# Altium PCB captivate_fr2633.PcbDoc (part 2 of 2)
Units mil, origin at the board's own origin, x right, y up, seen from the top; angles counter-clockwise.
Board outline 2500 x 2500 mil, 2 copper layers (Top Layer, Bottom Layer), stack 62 mil thick; 67 components, 64 nets, 248 pads, 53 vias.
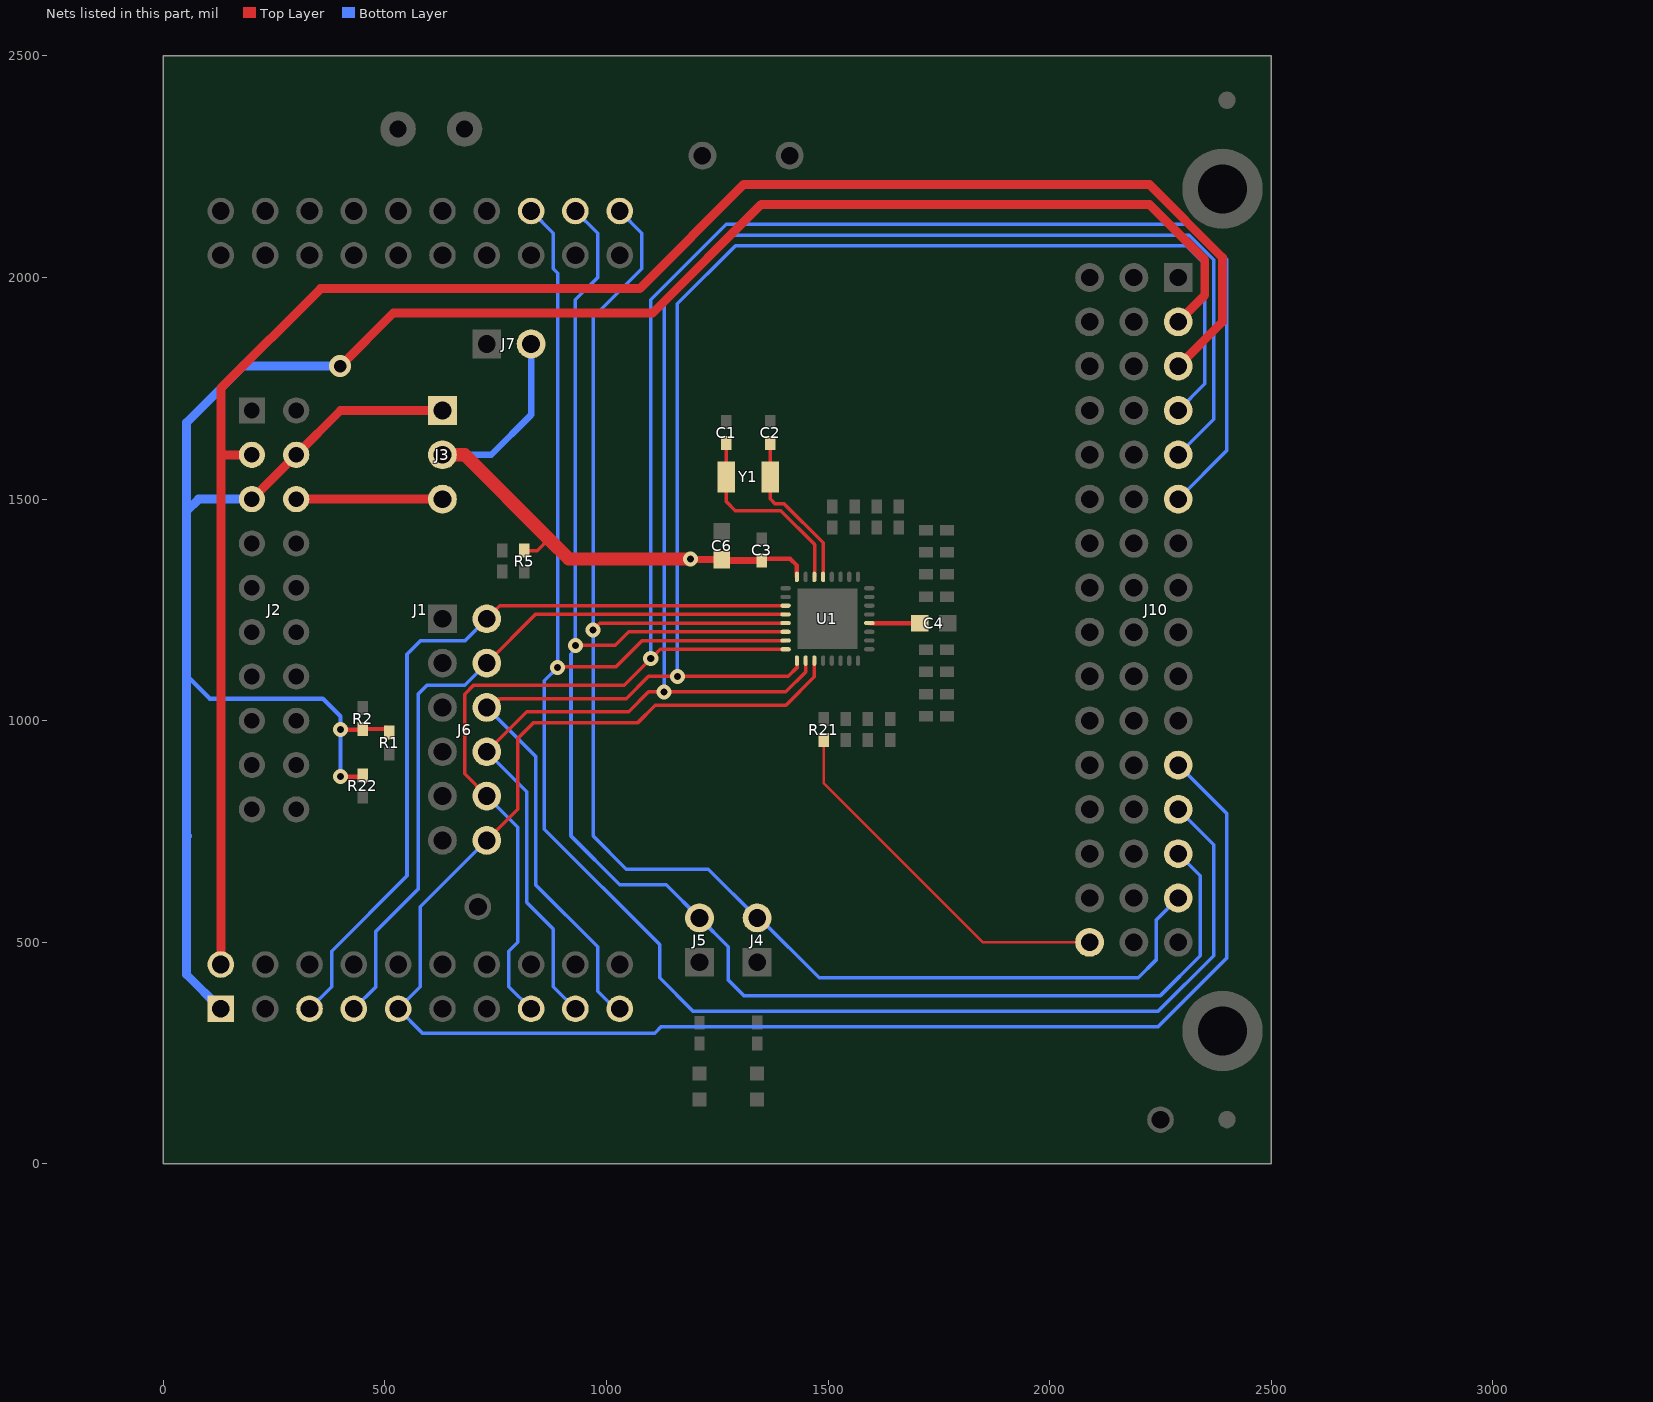
[diagram p2: the nets of this part, all layers, seen from the top]

## Via types
v1: diameter 34, hole 16, Top Layer to Bottom Layer, tented both sides, 47 vias
v2: diameter 19.68, hole 7.87, Top Layer to Bottom Layer, 5 vias
v3: diameter 50, hole 28, Top Layer to Bottom Layer, tented both sides, 1 vias

## Nets (pads, with @x,y where several pads share a name; then routed paths per layer and width w, separated by ;. In a path a pad name is that pad's centre, name@x,y a point inside that pad or via, vN(x,y) a via of type N, cw(c..) or ccw(c..) an arc to the next point about the centre after c; other vN are vias at no path point) (continued)
NetJ10_c16: J10.C16 R21.1 | length 845.5
  Top Layer w6: R21.1@1490,956.38 1490,860 1850,500 J10.C16@2090,500
P1.0: J1.13 J10.A13 U1.7 | length 4120.3
  Top Layer w8: v1(890,1120) 891.67,1121.67 1021.67,1121.67 1080,1180 1403.31,1180 U1.7@1404.17,1180.87
  Bottom Layer w8: J1.13@830,2150 880,2100 880,2020 890,2010 v1(890,1120) 860,1090 860,755 1120,495 1120,420 1195,345 2245,345 2370,470 2370,720 J10.A13@2290,800 J10.A13@2280,800
P1.1/IRQ: J1.8 J6.10 J10.A6 U1.8 | length 4353.9
  Top Layer w7.87: J6.10@730,830 680,880 680,1060 700,1080 1040,1080 v1(1100,1140) 1121.18,1161.18 U1.8@1404.17,1161.18
  Bottom Layer w7.87: J6.10@730,830 800,760 800,500 780,480 780,400 J1.8@830,350
  Bottom Layer w8: v1(1100,1140) 1100,1950 1270,2120 2320,2120 2400,2040 2400,1610 J10.A6@2290,1500
P1.6/LED2: J1.11 J4.2 J10.A15 U1.5 | length 3499.4
  Top Layer w8: v1(970,1205) 985,1220 1280,1220 U1.5@1404.17,1220.24
  Bottom Layer w8: J1.11@1030,2150 1080,2100 1080,2020 975,1915 970,1915 v1(970,1205) 970,740 1045,665 1230,665 J4.2@1340,555 1345,555 1480,420 2200,420 2240,460 2240,550 J10.A15@2290,600
P1.7/LED1: J1.12 J5.2 J10.A14 U1.6 | length 3841.7
  Top Layer w8: v1(930,1170) 1020,1170 1050.55,1200.55 U1.6@1404.17,1200.55
  Bottom Layer w8: J1.12@930,2150 980,2100 980,2000 930,1950 v1(930,1170) 920,1150 920,740 1030,630 1135,630 J5.2@1210,555 1275,490 1275,415 1310,380 2250,380 2340,470 2340,650 J10.A14@2290,700
P2.2/SYNC: J1.5 J6.12 J10.A12 U1.11 | length 3928.8
  Top Layer w8: J6.12@730,730 800,800 800,960 835,995 1070,995 1110,1035 1405,1035 1469.13,1099.13 U1.11@1469.13,1135.59
  Bottom Layer w8: J6.12@730,730 580,580 580,400 J1.5@530,350 585,295 1109,295 1124,310 2245,310 2400,465 2400,790 J10.A12@2290,900
UCA0_RXD: J1.4 J6.4 U1.4 | length 1673.9
  Top Layer w8: J6.4@730,1130 839.99,1239.99 919.99,1239.99 U1.4@1404.17,1239.92 U1.4@1404.09,1240
  Bottom Layer w8: J1.4@430,350 480,400 480,525 575,620 575,1060 595,1080 680,1080 J6.4@730,1130
UCA0_TXD: J1.3 J6.2 U1.3 | length 1790.7
  Top Layer w8: J6.2@730,1230 759.61,1259.61 U1.3@1404.17,1259.61
  Bottom Layer w8: J1.3@330,350 380,400 380,480 550,650 550,1150 580,1180 680,1180 J6.2@730,1230
UCB0_SCL: J1.9 J6.8 J10.A5 U1.10 | length 4160.7
  Top Layer w8: J6.8@730,930 820,1020 1050,1020 1095,1065 v1(1130,1065) 1404.45,1065 1449.45,1110 U1.10@1449.45,1135.59
  Bottom Layer w8: J6.8@730,930 820,840 820,590 880,530 880,400 J1.9@930,350 ; v1(1130,1065) 1130,1945.39 1279.61,2095 2315,2095 2370,2040 2370,1680 J10.A5@2290,1600
UCB0_SDA: J1.10 J6.6 J10.A4 U1.9 | length 4020.5
  Top Layer w7.87: 1045,1050 1095,1100 v1(1160,1100) 1410,1100
  Top Layer w8: J6.6@730,1030 740,1030 760,1050 1045,1050 ; J1.10@1020,350 J1.10@1030,350 ; 1410,1100 1430,1120 1430,1135.35 U1.9@1429.76,1135.59
  Bottom Layer w7.87: v1(1160,1100) 1160,1940.79 1291.28,2072.06 2307.94,2072.06 2350,2030 2350,1760 J10.A4@2290,1700
  Bottom Layer w8: J6.6@730,1030 840,920 840,630 980,490 980,390 J1.10@1020,350
VCC_5V: J1.21 J2.3 J10.A3 | length 4175.3
  Top Layer w20: J1.21@130,450 130,1750 355,1975 1075,1975 1310,2210 2225,2210 2390,2045 2390,1900 J10.A3@2290,1800 ; 130.05,1599.95 J2.3@200,1599.95
VCC_LDO: J1.1 J2.4 J2.5 J3.1 J10.A2 R1.2 R2.2 R22.2 | length 5459.7
  Top Layer w10: v1(400,874) 447.38,874 R22.2@450,876.62 ; v1(400,980) R2.2@448.62,980 ; R2.2@450,981.38 R1.2@502.24,981.38
  Top Layer w15: R2.2@448.62,980 R2.2@450,981.38 ; R1.2@502.24,981.38 R1.2@510,973.62
  Top Layer w20: J2.5@200,1499.95 J2.4@300,1599.95 400.05,1700 J3.1@630,1700 ; v3(399,1800) 519,1920 1104.61,1920 1349.61,2165 2225,2165 2350,2040 2350,1960 J10.A2@2290,1900
  Bottom Layer w10: 52.5,1102.5 105,1050 360,1050 400,1010 v1(400,980) v1(400,874)
  Bottom Layer w15: 52.5,745 57.5,740
  Bottom Layer w20: J1.1@130,350 52.5,427.5 52.5,745 52.5,1102.5 52.5,1472.5 ; J2.5@200,1499.95 79.95,1499.95 52.5,1472.5 ; v3(399,1800) 180,1800 52.5,1672.5 52.5,1472.5 ; J10.A2@2290,1900 J10.A2@2311.48,1900
VCC_METERED: J2.6 J3.3 | length 330
  Top Layer w20: J2.6@300,1499.95 J2.6@300,1499.95 J3.3@630,1500
VCC_MSP: C3.1 C6.1 J3.2 J7.2 R5.2 U1.32 | length 1395.5
  Top Layer w8: R5.2@815,1383.62 843.62,1383.62 870,1410
  Top Layer w10: C3.1@1350,1356.38 1358.62,1365 1415,1365 1429.76,1350.24 U1.32@1429.76,1324.57
  Top Layer w15: v1@1191.18,1363.82 1260,1363.82 1262.44,1361.38 C3.1@1350,1361.38
  Top Layer w30: J3.2@630,1600 680,1600 870,1410 915,1365 v1(1190,1365)
  Bottom Layer w15: J3.2@630,1600 740,1600 830,1690 J7.2@830,1850
VREG: C4.1 U1.20 | length 117.5
  Top Layer w10: U1.20@1593.15,1220.24 C4.1@1710.61,1220
XIN: C1.1 U1.30 Y1.1 | length 445.1
  Top Layer w8: C1.1@1270,1626.38 1270.79,1625.59 Y1.1@1270.79,1550 1270.79,1494.21 1290.87,1474.13 1393.42,1474.13 1470,1397.55 1470,1325.43 U1.30@1469.13,1324.57
XOUT: C2.1 U1.29 Y1.2 | length 363.4
  Top Layer w8: C2.1@1370,1626.38 1369.21,1625.59 Y1.2@1369.21,1550 1369.21,1500.79 1380,1490 1400,1490 1488.82,1401.18 U1.29@1488.82,1324.57
pads on no net: FID1.1 FID3.1 H1.0 H2.0 H3.0 H4.0 J1.2 J1.6 J1.7 J1.14 J1.15 J1.16 J1.17 J1.18 J1.19 J1.23 J1.24 J1.25 J1.26 J1.27 J1.28 J1.29 J1.30 J1.31 J1.32 J1.33 J1.34 J1.35 J1.36 J1.37 J1.38 J1.39 J1.40 J10.B2 J10.H1 J10.H2 SH-J1.0 SH-J2.0 SH-J3.0 SH-J4.0 SH-J5.0 SH-J6.0 SH-J7.0 SH-J8.0 SH-J9.0 SH-J10.0

## Polygon pours and split planes (outlines as drawn)
GND on Top Layer "hatched_gnd_top" (hatched 45Degree grid 47 track 8, remove dead copper, pour order 30): 1450,2500 1450,0 2500,0 2500,2500 1450,2500
GND on Top Layer "Top Layer-No Net" (solid, remove dead copper, pour order 13): 1210,1460 1430,1460 1430,1750 1400,1780 1240,1780 1210,1750 1210,1460
GND on Top Layer "solid_gnd_top" (solid, remove dead copper, pour order 46): 0,0 1450,0 1450,1400.21 1400,1450 1200,1450 1200,1755 1235,1790 1270,1790 1395,1790 1405,1790 1440,1755 1440,1490 1450,1480 1450,2500 0,2500
GND on Bottom Layer "hatched_gnd_bottom" (hatched 45Degree grid 47 track 8, remove dead copper, pour order 62): 1450,2500 2500,2500 2500,0 1450,0 1450,2500
GND on Bottom Layer "Bottom Layer-No Net 1" (solid, remove dead copper, pour order 60): 1430,1460 1210,1460 1210,1750 1240,1780 1400,1780 1430,1750
GND on Bottom Layer "Bottom Layer-No Net" (solid, remove dead copper, pour order 54): 0,2500 0,0 1450,0 1450,1400 1400,1450 1200,1450 1200,1755 1235,1790 1405,1790 1440,1755 1440,1489.6 1450,1479.6 1450,2500

## Keep-outs
Keep-Out Layer:
  circle w10: c2400,2400 r50.25
  circle w10: c2400,100 r50.99
  lines w5: 0,0 0,2500 2500,2500 2500,0 0,0
  text ".Layer_Name" at -73,-1708.49 h60

## Other copper
Top Layer:
  text ".Layer_Name" at -73,-1708.49 h60
Bottom Layer:
  region net GND: 1420,1287.01 1420,1300 1451.35,1300 1570,1300 1570,1160 1420,1160
  text ".Layer_Name" at -73,-1708.49 h60

## Silkscreen, mask and mechanical layers (free items; w line width, h text height)
Top Overlay:
  lines w10: 530,125 530,270 ; 830,120 830,270 ; 1925,450 2040,450 2040,2035 1925,2035 ; 1925,850 2120,850 ; 1925,1250 2120,1250 ; 1925,1650 2120,1650 ; 210,2215 210,2470 780,2470 780,2215 210,2215
  text "TM" at 1755,2420 h40
  text "Capacitive Touch" at 1825,2395 h60
  text "CapTIvate" at 1504.38,2393.6 h60
  text "EXTERNAL" at 230,2390 h30
  text "SUPPLY" at 230,2320 h30
  text "MCU Development Board" at 1579.38,2316.51 h60
  text "TO MCU VCC" at 230,2250 h30
  text ".PRJ_Number" at 1660,2250 h60
  text "P1.0" at 850,2220 h35 r90
  text "P1.7" at 945,2220 h35 r90
  text "P1.6" at 1045,2220 h35 r90
  text "MCU RESET" at 1180,2075 h35
  text "3.3" at 1950,1980 h30
  text "CAP" at 1825,1890 h30
  text "3.2" at 1950,1880 h30
  text "EXT VCC" at 908,1858 h30
  text "BLK" at 1825,1835 h30
  text "ENABLE" at 908,1808 h30
  text "3" at 1825,1785 h30
  text "3.1" at 1950,1785 h30
  text "3.3V LDO" at 700,1685 h30
  text "3.0" at 1950,1685 h30
  text "MCU VCC" at 700,1580 h30
  text "2.3" at 1950,1580 h30
  text "CAP" at 1825,1490 h30
  text "3.3V METERED" at 700,1485 h30
  text "2.2" at 1950,1480 h30
  text "BLK" at 1825,1435 h30
  text "2" at 1825,1385 h30
  text "2.1" at 1950,1385 h30
  text "." at 1370,1298.98 h60
  text "2.0" at 1950,1285 h30
  text "TXD/P1.4" at 805,1215 h30
  text "1.3" at 1950,1180 h30
  text "RXD/P1.5" at 805,1115 h30
  text "CAP" at 1825,1090 h30
  text "1.2" at 1950,1080 h30
  text "MSP430FR2633" at 1260,1060 h35
  text "BLK" at 1825,1035 h30
  text "SDA/P1.2" at 805,1015 h30
  text "1" at 1825,985 h30
  text "1.1" at 1950,985 h30
  text "SCL/P1.3" at 805,915 h30
  text "1.0" at 1950,885 h30
  text "IRQ/P1.1" at 805,815 h30
  text "0.3" at 1950,780 h30
  text "SYNC/P2.2" at 805,715 h30
  text "CAP" at 1825,690 h30
  text "0.2" at 1950,680 h30
  text "BLK" at 1825,635 h30
  text "P1.7" at 1225,630 h30 r90
  text "P1.6" at 1355,630 h30 r90
  text "0" at 1825,585 h30
  text "0.1" at 1950,585 h30
  text "GND" at 570,565 h35
  text "0.0" at 1950,485 h30
  text "TXD" at 348,173.7 h35 r90
  text "RXD" at 448,173.7 h35 r90
  text "SCL" at 955,173.7 h35 r90
  text "SDA" at 1060,173.7 h35 r90
  text "GND" at 2172.59,150 h35
  text "P2.2/SYNC" at 350,60 h35
  text "P1.1/IRQ" at 750,60 h35
  text "LED1" at 1130,45 h35
  text "LED2" at 1315,45 h35
  text ".Layer_Name" at -73,-1708.49 h60
Bottom Overlay:
  lines w10: 530,125 530,270 ; 830,120 830,285
  text "P1.0" at 845,2340 h35 r90
  text "P1.7" at 940,2340 h35 r90
  text "P1.6" at 1040,2340 h35 r90
  text "Capacitive Touch MCU Development Board" at 946.93,1862.15 h70 r90
  text "MSP CapTIvate    MCUs" at 870,1703.29 h90 r90
  text "GNDx2" at 160,1690 h30
  text ".PRJ_Number" at 2435,1625 h35 r90
  text "5V" at 157.5,1590 h30
  text "3V3" at 422.5,1589.95 h30
  text "www.ti.com/captivate" at 1015,1551.28 h70 r90
  text "3V3" at 157.5,1490 h30
  text "METERED" at 542.46,1490 h30
  text "GND" at 160,1390 h30
  text "GND" at 422.5,1390 h30
  text "TM" at 840,1135 h50 r90
  text "RXD" at 160,1090 h30
  text "TXD" at 420,1090 h30
  text "Rev" at 2435,1040 h35 r90
  text "SCL" at 160,1000 h30
  text "SDA" at 420,1000 h30
  text ".PCB_Rev" at 2435,920 h35 r90
  text "SYNC" at 160,900 h30
  text "IRQ" at 417.5,900 h30
  text "GNDx2" at 160,780 h30
  text "TXD" at 350,270 h35 r90
  text "RXD" at 450,270 h35 r90
  text "SCL" at 955,270 h35 r90
  text "SDA" at 1055,270 h35 r90
  text "P2.2/SYNC" at 640,60 h35
  text "P1.1/IRQ" at 990,60 h35
  text ".Layer_Name" at -73,-1708.49 h60
Top Paste:
  text ".Layer_Name" at -73,-1708.49 h60
Bottom Paste:
  text ".Layer_Name" at -73,-1708.49 h60
Top Solder:
  text ".Layer_Name" at -73,-1708.49 h60
  text ".Layer_Name" at -73,-1708.49 h60
Bottom Solder:
  text ".Layer_Name" at -73,-1708.49 h60
Drill Guide:
  text ".Layer_Name" at -73,-1708.49 h60
M1 Board Outline:
  the board outline again, w5
  text ".Layer_Name" at -73,-1708.49 h60
M2 Board Dimensions:
  rectangle: -650,-1125 -525,-1000
  rectangle: -525,-1250 -150,-1125
  lines w7: -650,-1125 350,-1125 ; -525,-1250 -525,-1000 ; -400,-1250 -400,-1000 ; -150,-1250 -150,-1000 ; 100,-1250 100,-1000 ; -650,-1250 350,-1250 350,-1000 -650,-1000 -650,-1250
  text ".Layer_Name" at -73,-1708.49 h60
M3 3D STEP Top:
  text ".Layer_Name" at -73,-1708.49 h60
M4 3D STEP Bottom:
  text ".Layer_Name" at -73,-1708.49 h60
M5 Assembly Top:
  lines w10: -942,-1780.17 5658,-1780.17 ; -942,-1576.83 5660,-1576.83 ; -942,-1373.5 -942,-1983.5 3063,-1983.5 5660,-1983.5 5660,-1373.5 -941.5,-1373.5 -941.5,-1983.5 634,-1983.5 ; 1523,-1983.5 1523,-1373.5 ; 2790,-1576.83 2790,-1373.5 ; 3630,-1576.83 3630,-1373.5 ; 4252,-1990 4252,-1787.17
  text "COMPONENTS MARKED 'DNP' SHOULD NOT BE POPULATED." at 503.5,-1168.5 h60
  text "ASSEMBLY VARIANT:" at 503,-1284 h60
  text ".VariantName" at 1539,-1284 h60
  text "PCB VIEWED FROM TOP SIDE" at -878.5,-1505.67 h60
  text "BOARD #:" at 1598,-1505.67 h60
  text ".PRJ_Number" at 2143.5,-1505.67 h60
  text "REV:" at 2988,-1505.67 h60
  text ".PCB_Rev" at 3279.5,-1505.67 h60
  text "SVN REV:" at 3826,-1505.67 h60
  text ".VersionControl_RevNumber" at 4332,-1505.67 h60
  text "PLOT NAME =" at -878.5,-1914.34 h60
  text ".plot_File_Name" at -73,-1914.34 h60
  text "GENERATED    :" at 1600,-1914.34 h60
  text ".Print_Date" at 2469.5,-1914.34 h60
  text ".Print_Time" at 3198.5,-1914.34 h60
  text "TEXAS INSTRUMENTS" at 4463,-1914.34 h60
M6 Assembly Bottom:
  lines w10: -942.5,-1577.33 5659.5,-1577.33 ; -940.5,-1780.67 5659.5,-1780.67 ; 465.5,-1990.5 465.5,-1787.67 ; 1087.5,-1577.33 1087.5,-1374 ; 1927.5,-1577.33 1927.5,-1374 ; 3194.5,-1984 3194.5,-1374 ; 4083.5,-1984 5659,-1984 5659,-1374 -942.5,-1374 -942.5,-1984 1654.5,-1984 5659.5,-1984 5659.5,-1374
  text "COMPONENTS MARKED 'DNP' SHOULD NOT BE POPULATED." at 5452,-1168 h60
  text ".VariantName" at 4408,-1284 h60
  text "ASSEMBLY VARIANT:" at 5447,-1284 h60
  text ".VersionControl_RevNumber" at 385.5,-1506.17 h60
  text "SVN REV:" at 891.5,-1506.17 h60
  text ".PCB_Rev" at 1438,-1506.17 h60
  text "REV:" at 1729.5,-1506.17 h60
  text ".PRJ_Number" at 2574,-1506.17 h60
  text "BOARD #:" at 3119.5,-1506.17 h60
  text "PCB VIEWED FROM BOTTOM SIDE" at 5596,-1506.17 h60
  text "TEXAS INSTRUMENTS" at 254.5,-1914.84 h60
  text ".Print_Time" at 1519,-1914.84 h60
  text ".Print_Date" at 2248,-1914.84 h60
  text "GENERATED    :" at 3117.5,-1914.84 h60
  text ".plot_File_Name" at 4790.5,-1914.84 h60
  text "PLOT NAME =" at 5596,-1914.84 h60
M9 Title Sheet:
  drawing of 57 lines, arcs and shapes, not listed
  text "1" at 89.84,7186.5 h70
  text "2" at 2585.5,7186.5 h70
  text "3" at 5074.84,7186.5 h70
  text "4" at 7581.51,7186.5 h70
  text "5" at 10080.5,7186.5 h70
  text "6" at 12585.5,7186.5 h70
  text "A" at -1066.5,6043.5 h70
  text "A" at 13733.5,6043.5 h70
  text "B" at -1066.5,3663.5 h70
  text "B" at 13733.5,3663.5 h70
  text "C" at -1066.5,1288.5 h70
  text "C" at 13733.5,1288.5 h70
  text "PROJECT TITLE:" at 10693.5,-572.5 h45
  text ".PRJ_Title" at 10743.5,-705.83 h70
  text "DESIGNED FOR:" at 10693.5,-873.5 h45
  text ".PRJ_Customer" at 10743.5,-1013.5 h70
  text "D" at -1066.5,-1081.5 h70
  text "D" at 13733.5,-1081.5 h70
  text "FILE NAME:" at 10693.5,-1173.5 h45
  text ".PCB_File_Name_No_Path" at 10743.5,-1293.5 h70
  text "Texas Instruments (TI) and/or its licensors do not warrant the accuracy or completeness of this specification" at 5724,-1455.34 h45
  text "ENGINEER:" at 10693.5,-1463.5 h45
  text "LAYOUT BY:" at 12198.5,-1463.5 h45
  text "or any information contained therein. TI and/or its licensors do not warrant that this design will meet" at 5679.01,-1568 h45
  text ".PRJ_Engineer" at 10743.5,-1618.49 h70
  text ".PCB_Layout" at 12249,-1618.49 h70
  text "the specifications, will be suitable for your application or fit for any particular purpose, or will operate in" at 5679.01,-1680.67 h45
  text ".Layer_Name" at -73,-1708.49 h60
  text "ALTIUM DESIGNER VERSION:" at 12198.5,-1773.5 h45
  text "an implementation. TI and/or its licensors do not warrant that the design is production worthy. You should" at 5679.01,-1793.33 h45
  text "completely validate and test your design implementation to confirm the system functionality for your application." at 5724,-1906 h45
  text ".print_Scale" at 10743.5,-1906.83 h70
  text ".Application_BuildNumber" at 12249,-1906.83 h70
  text "1" at 89.84,-2113.5 h70
  text "2" at 2585.5,-2113.5 h70
  text "3" at 5074.84,-2113.5 h70
  text "4" at 7581.51,-2113.5 h70
  text "5" at 10080.5,-2113.5 h70
  text "6" at 12585.5,-2113.5 h70
M10 Fab Notes:
  drawing of 185 lines, arcs and shapes, not listed
  text "DESIGN INFORMATION" at 11731.02,5060 h60
  text "MIN. TRACK WIDTH:" at 11086.46,4880 h60
  text "6" at 12182.7,4880 h60
  text "MIL" at 12337.46,4880 h60
  text "MIN. CLEARANCE:" at 11086.46,4748 h60
  text "0.2" at 12122.7,4748 h60
  text "mm" at 12337.46,4748 h60
  text "MIN. VIA PAD SIZE:" at 11086.46,4616 h60
  text "30" at 12152.71,4616 h60
  text "MIL" at 12337.46,4616 h60
  text "0.05mm (2MIL)" at 11781.46,4474.29 h60
  text "MINIMUM ANNULAR RING" at 10757.23,4470 h60
  text "EXTERNAL" at 12489.46,4470 h60
  text "PER" at 10957.23,4352 h60
  text "IPC-D-275 CLASS 2 LEVEL C" at 11177.23,4352 h60
  text "MIL, HOLES" at 12665.46,4239.71 h60
  text "+/-" at 12273,4239 h60
  text "+/-" at 13127,4239 h60
  text "REGISTRATION TOLERANCES:" at 10757.23,4234 h60
  text "METAL" at 11957,4234 h60
  text "5" at 12533.2,4234 h60
  text "3" at 13366.2,4234 h60
  text "MIL" at 13482.46,4234 h60
  text "MATERIAL:" at 10682.46,4024.54 h60
  text "FR-4 High Tg" at 11668.9,3884.21 h60
  text "FR-408" at 11103.46,3875.64 h60
  text "X" at 11515.46,3875.64 h60
  text "OTHER" at 12591.46,3875.64 h60
  text "62 MIL (1.6mm) +/-10%" at 11423.56,3712.92 h60
  text "THICKNESS:" at 10757.23,3708.64 h60
  text "X" at 11295.4,3708.64 h60
  text "OTHER" at 12708.46,3708.64 h60
  text "TOLERANCE:" at 10757.23,3550.64 h60
  text "X" at 11596.53,3550.64 h60
  text "ANSI IPC-6012 TYPE 3 CLASS 2" at 11783.48,3550.64 h60
  text "OTHER +/-" at 11783.46,3394.64 h60
  text "BOW & TWIST:" at 10757.23,3237.64 h60
  text "X" at 11596.53,3237.64 h60
  text "ANSI IPC-6012 TYPE 3 CLASS 2" at 11783.48,3237.64 h60
  text "OTHER +/-" at 11783.46,3079.13 h60
  text "DRILLING:" at 10682.46,2940.64 h60
  text "REFERENCE:" at 10757.23,2823.64 h60
  text "X" at 11405.46,2823.64 h60
  text "AS SHOWN" at 11592.46,2823.64 h60
  text "X" at 12306.46,2823.64 h60
  text "NC_DRILL FILES" at 12443.46,2823.64 h60
  text "PTH MIN COPPER THICKNESS:" at 10757.23,2665.64 h60
  text "X" at 12107.46,2665.64 h60
  text "1MIL" at 12244.46,2665.64 h60
  text "OTHER" at 12741.46,2665.64 h60
  text "BOARD FINISH:" at 10682.46,2506.64 h60
  text "SILKSCREEN:" at 10837.68,2388.64 h60
  text "X" at 11786.46,2388.64 h60
  text "TOP" at 11912.46,2388.64 h60
  text "X" at 12296.46,2388.64 h60
  text "BOTTOM" at 12423.46,2388.64 h60
  text "SILKSCREEN COLOR:" at 10837.68,2221.64 h60
  text "X" at 11785.42,2221.64 h60
  text "WHITE" at 11912.46,2221.64 h60
  text "OTHER" at 12423.46,2221.64 h60
  text "SOLDER RESIST COLOR:" at 10837.68,2051.64 h60
  text "X" at 12520,1895 h60
  text "GREEN" at 11532.46,1892.44 h60
  text "BLUE" at 12123.46,1892.44 h60
  text "OTHER" at 12661.46,1892.44 h60
  text "BLACK" at 12960,1885 h200
  text "IMMERSION GOLD (ENIG)" at 11743.46,1703.92 h60
  text "ENEPIG" at 13081,1700.64 h60
  text "SURFACE FINISH:" at 10682.46,1699.64 h60
  text "X" at 11556.51,1699.64 h60
  text "IMM. TIN/SILVER OR EQUIV" at 11012,1542.64 h60
  text "OTHER" at 12443.46,1542.64 h60
  text "ARRAY/PANEL:" at 10682.46,1363.64 h60
  text "CUT AND TRIM PER MECH LAYER 1" at 11743.46,1359.35 h60
  text "N.C. ROUTE" at 11743.46,1207.64 h60
  text "X" at 12422.46,1207.64 h60
  text "V. SCORE" at 12609.46,1207.64 h60
  text "CERTIFICATION:" at 10682.46,1070.64 h60
  text "MATERIALS AND WORKMANSHIP FOR ALL PCBS" at 11407.46,1070.64 h60
  text "TO MEET OR EXCEED THE REQUIREMENTS OF:" at 11407.46,972.64 h60
  text "X" at 11033.96,836.13 h60
  text "ANSI IPC-A-600F CLASS ->" at 11172.96,836.13 h60
  text "X" at 12812.02,836.13 h60
  text "2" at 12930.96,836.14 h60
  text "1" at 12615.96,834.64 h60
  text "3" at 13284.96,834.64 h60
  text "X" at 11036.02,676.64 h60
  text "UL 94V-0" at 11172.96,676.64 h60
  text "X" at 11848.02,676.64 h60
  text "RoHS" at 11984.96,676.64 h60
  text "OTHER" at 12629.36,676.64 h60
  text "PER ORDER" at 13026.42,676.64 h60
  text "ADDITIONAL REQUIREMENTS:" at 10682.46,535.64 h60
  text "MICROSECTION:" at 10757.23,420.64 h60
  text "YES" at 11662.96,420.64 h60
  text "REQUIRED" at 12524.46,264.49 h60
  text "BARE BOARD ELEC. TEST:" at 10757.23,261.64 h60
  text "NONE" at 12062.96,261.64 h60
  text "X" at 12397.46,261.64 h60
  text "PER ORDER" at 13116.46,261.64 h60
  text "MANUFACTURER'S UL:" at 10757.23,104.64 h60
  text "RAIL" at 11922.96,100.35 h60
  text "METAL" at 12414.77,100.35 h60
  text "X" at 12790,100 h60
  text "SILK" at 12926.46,100.35 h60
  text ".Layer_Name" at -73,-1708.49 h60
M11 Gerber Information:
  lines w10: -942,-1780.17 5658,-1780.17 ; -942,-1576.83 5660,-1576.83 ; -942,-1373.5 -942,-1983.5 3063,-1983.5 5660,-1983.5 5660,-1373.5 -941.5,-1373.5 -941.5,-1983.5 634,-1983.5 ; 1523,-1983.5 1523,-1373.5 ; 2790,-1576.83 2790,-1373.5 ; 3630,-1576.83 3630,-1373.5 ; 4252,-1990 4252,-1787.17
  text "ALL ARTWORK VIEWED FROM TOP SIDE" at -878.5,-1505.67 h60
  text "BOARD #:" at 1598,-1505.67 h60
  text ".PRJ_Number" at 2143.5,-1505.67 h60
  text "REV:" at 2988,-1505.67 h60
  text ".PCB_Rev" at 3279.5,-1505.67 h60
  text "SVN REV:" at 3826,-1505.67 h60
  text ".VersionControl_RevNumber" at 4332,-1505.67 h60
  text "LAYER NAME =" at -878.5,-1708.49 h60
  text "PLOT NAME =" at -878.5,-1914.34 h60
  text ".plot_File_Name" at -73,-1914.34 h60
  text "GENERATED    :" at 1600,-1914.34 h60
  text ".Print_Date" at 2469.5,-1914.34 h60
  text ".Print_Time" at 3198.5,-1914.34 h60
  text "TEXAS INSTRUMENTS" at 4463,-1914.34 h60
M12 Stackup:
  drawing of 191 lines, arcs and shapes, not listed
  text "Layer" at 5640.34,1165 h60
  text "Name" at 6050.26,1165 h60
  text "Material" at 6980,1165 h60
  text "Thickness" at 7839.77,1165 h60
  text "Constant" at 8489.6,1165 h60
  text "Board Layer Stack" at 9059.46,1165 h60
  text "1" at 5640.34,1045 h60
  text "Top Overlay" at 6050.26,1045 h60
  text "2" at 5640.34,925 h60
  text "Top Solder" at 6050.26,925 h60
  text "Solder Resist" at 6980,925 h60
  text "0.40mil" at 7839.77,925 h60
  text "3.5" at 8489.6,925 h60
  text "3" at 5640.34,805 h60
  text "Top Layer" at 6050.26,805 h60
  text "Copper" at 6980,805 h60
  text "1.40mil" at 7839.77,805 h60
  text "4" at 5640.34,685 h60
  text "Dielectric1" at 6050.26,685 h60
  text "FR-4" at 6980,685 h60
  text "59.20mil" at 7839.77,685 h60
  text "4.2" at 8489.6,685 h60
  text "5" at 5640.34,565 h60
  text "Bottom Layer" at 6050.26,565 h60
  text "Copper" at 6980,565 h60
  text "1.40mil" at 7839.77,565 h60
  text "6" at 5640.34,445 h60
  text "Bottom Solder" at 6050.26,445 h60
  text "Solder Resist" at 6980,445 h60
  text "0.40mil" at 7839.77,445 h60
  text "3.5" at 8489.6,445 h60
  text "7" at 5640.34,325 h60
  text "Bottom Overlay" at 6050.26,325 h60
  text ".Layer_Name" at -73,-1708.49 h60
M13 Component Bodies Top:
  text ".Layer_Name" at -73,-1708.49 h60
M14 Component Bodies Bottom:
  text ".Layer_Name" at -73,-1708.49 h60
M15 Courtyards Top:
  text ".Layer_Name" at -73,-1708.49 h60
M16 Courtyards Bottom:
  text ".Layer_Name" at -73,-1708.49 h60
Drill Drawing:
  circle w1: c6073.12,-315 r25
  lines w1: 6048.12,-927.5 6060.62,-927.5 6073.12,-940 6085.62,-927.5 6098.12,-927.5 6085.62,-915 6098.12,-902.5 6085.62,-902.5 6073.12,-890 6060.62,-902.5 6048.12,-902.5 6060.62,-915 6048.12,-927.5 ; 6048.12,-740 6098.12,-740 6073.12,-790 6048.12,-740 ; 6048.12,-640 6048.12,-627.5 6060.62,-615 6048.12,-602.5 6048.12,-590 6060.62,-590 6073.12,-602.5 6085.62,-590 6098.12,-590 6098.12,-602.5 6085.62,-615 6098.12,-627.5 6098.12,-640 6085.62,-640 6073.12,-627.5 6060.62,-640 6048.12,-640 ; 6048.12,-477.5 6060.62,-477.5 6060.62,-490 6085.62,-490 6085.62,-477.5 6098.12,-477.5 6098.12,-452.5 6085.62,-452.5 6085.62,-440 6060.62,-440 6060.62,-452.5 6048.12,-452.5 6048.12,-477.5 ; 6048.12,-190 6073.12,-177.5 6098.12,-190 6085.62,-165 6098.12,-140 6073.12,-152.5 6048.12,-140 6060.62,-165 6048.12,-190 ; 6048.12,-40 6098.12,-40 6098.12,10 6048.12,10 6048.12,-40 ; 6048.12,110 6098.12,110 6098.12,160 6048.12,160 6048.12,110 ; 6058.12,120 6088.12,120 6088.12,150 6058.12,150 6058.12,120
  lines w15: 5980,-985 9858.97,-985 ; 5980,215 9858.97,215 ; 6530.88,-1135 6530.88,365 ; 7228.69,-1135 7228.69,365 ; 8574.29,-1135 8574.29,365 ; 9080.17,-1135 9080.17,365 ; 5980,-1135 9858.97,-1135 9858.97,365 5980,365 5980,-1135
  text "Symbol" at 6070,260 h72
  text "Hit Count" at 6575.88,260 h72
  text "Finished Hole Size" at 7273.69,260 h72
  text "Plated" at 8619.29,260 h72
  text "Hole Type" at 9125.17,260 h72
  text "1" at 6575.88,110 h60
  text "28.00mil (0.711mm)" at 7273.69,110 h60
  text "PTH" at 8619.29,110 h60
  text "Round" at 9125.17,110 h60
  text "2" at 6575.88,-40 h60
  text "37.99mil (0.965mm)" at 7273.69,-40 h60
  text "PTH" at 8619.29,-40 h60
  text "Round" at 9125.17,-40 h60
  text "2" at 6575.88,-190 h60
  text "110.24mil (2.800mm)" at 7273.69,-190 h60
  text "PTH" at 8619.29,-190 h60
  text "Round" at 9125.17,-190 h60
  text "5" at 6575.88,-340 h60
  text "7.87mil (0.200mm)" at 7273.69,-340 h60
  text "PTH" at 8619.29,-340 h60
  text "Round" at 9125.17,-340 h60
  text "20" at 6575.88,-490 h60
  text "35.43mil (0.900mm)" at 7273.69,-490 h60
  text "PTH" at 8619.29,-490 h60
  text "Round" at 9125.17,-490 h60
  text "47" at 6575.88,-640 h60
  text "16.00mil (0.406mm)" at 7273.69,-640 h60
  text "PTH" at 8619.29,-640 h60
  text "Round" at 9125.17,-640 h60
  text "50" at 6575.88,-790 h60
  text "39.37mil (1.000mm)" at 7273.69,-790 h60
  text "PTH" at 8619.29,-790 h60
  text "Round" at 9125.17,-790 h60
  text "63" at 6575.88,-940 h60
  text "40.00mil (1.016mm)" at 7273.69,-940 h60
  text "PTH" at 8619.29,-940 h60
  text "Round" at 9125.17,-940 h60
  text "190 Total" at 6575.88,-1090 h60
  text ".Layer_Name" at -73,-1708.49 h60

## Dimensions
0,0 to 0,2500 on M2 Board Dimensions
0,0 to 2500,0 on M2 Board Dimensions
-650,-1250 to 350,-1250 on M2 Board Dimensions

## Text inside footprints (layer, text, board x,y; h text height)
J1: Top Overlay "21" at 60,430 h30 r90; Top Overlay "40" at 60,2025 h30 r90; Top Overlay "31" at 1130,2030 h30 r90; Top Overlay "30" at 1130,425 h30 r90; Top Overlay "1" at 60,345 h30 r90; Top Overlay "10" at 1130,328 h30 r90; Top Overlay "11" at 1130,2133 h30 r90; Top Overlay "20" at 60,2125 h30 r90
J2: Top Overlay "1" at 180,1800 h50 r270; M5 Assembly Top "PCB edge" at 0,649.95 h20 r270
J10: Top Overlay "A" at 2263.66,2110 h80 r270; Top Overlay "B" at 2163.66,2110 h80 r270; Top Overlay "C" at 2063.66,2110 h80 r270; M2 Board Dimensions "PCB Edge" at 2458.66,1330 h23.62 r270
Logo1: Bottom Overlay "Pb" at 1903.9,529.6 h60 r90